# Altium PCB PC110-itx.PcbDoc (part 12 of 16)
Units mm, origin at the board's own origin, x right, y up, seen from the top; angles counter-clockwise.
Board outline 170 x 170 mm, 16 copper layers (FC1, FC2, FC3, FC4, IP1, IC1, IC2, IP2, IP3, IC3, IC4, IP4, BC4, BC3, BC2, BC1), stack 3.903 mm thick; 935 components, 1357 nets, 4698 pads, 3240 vias.
Unrouted connection lines stored in the file: 552.
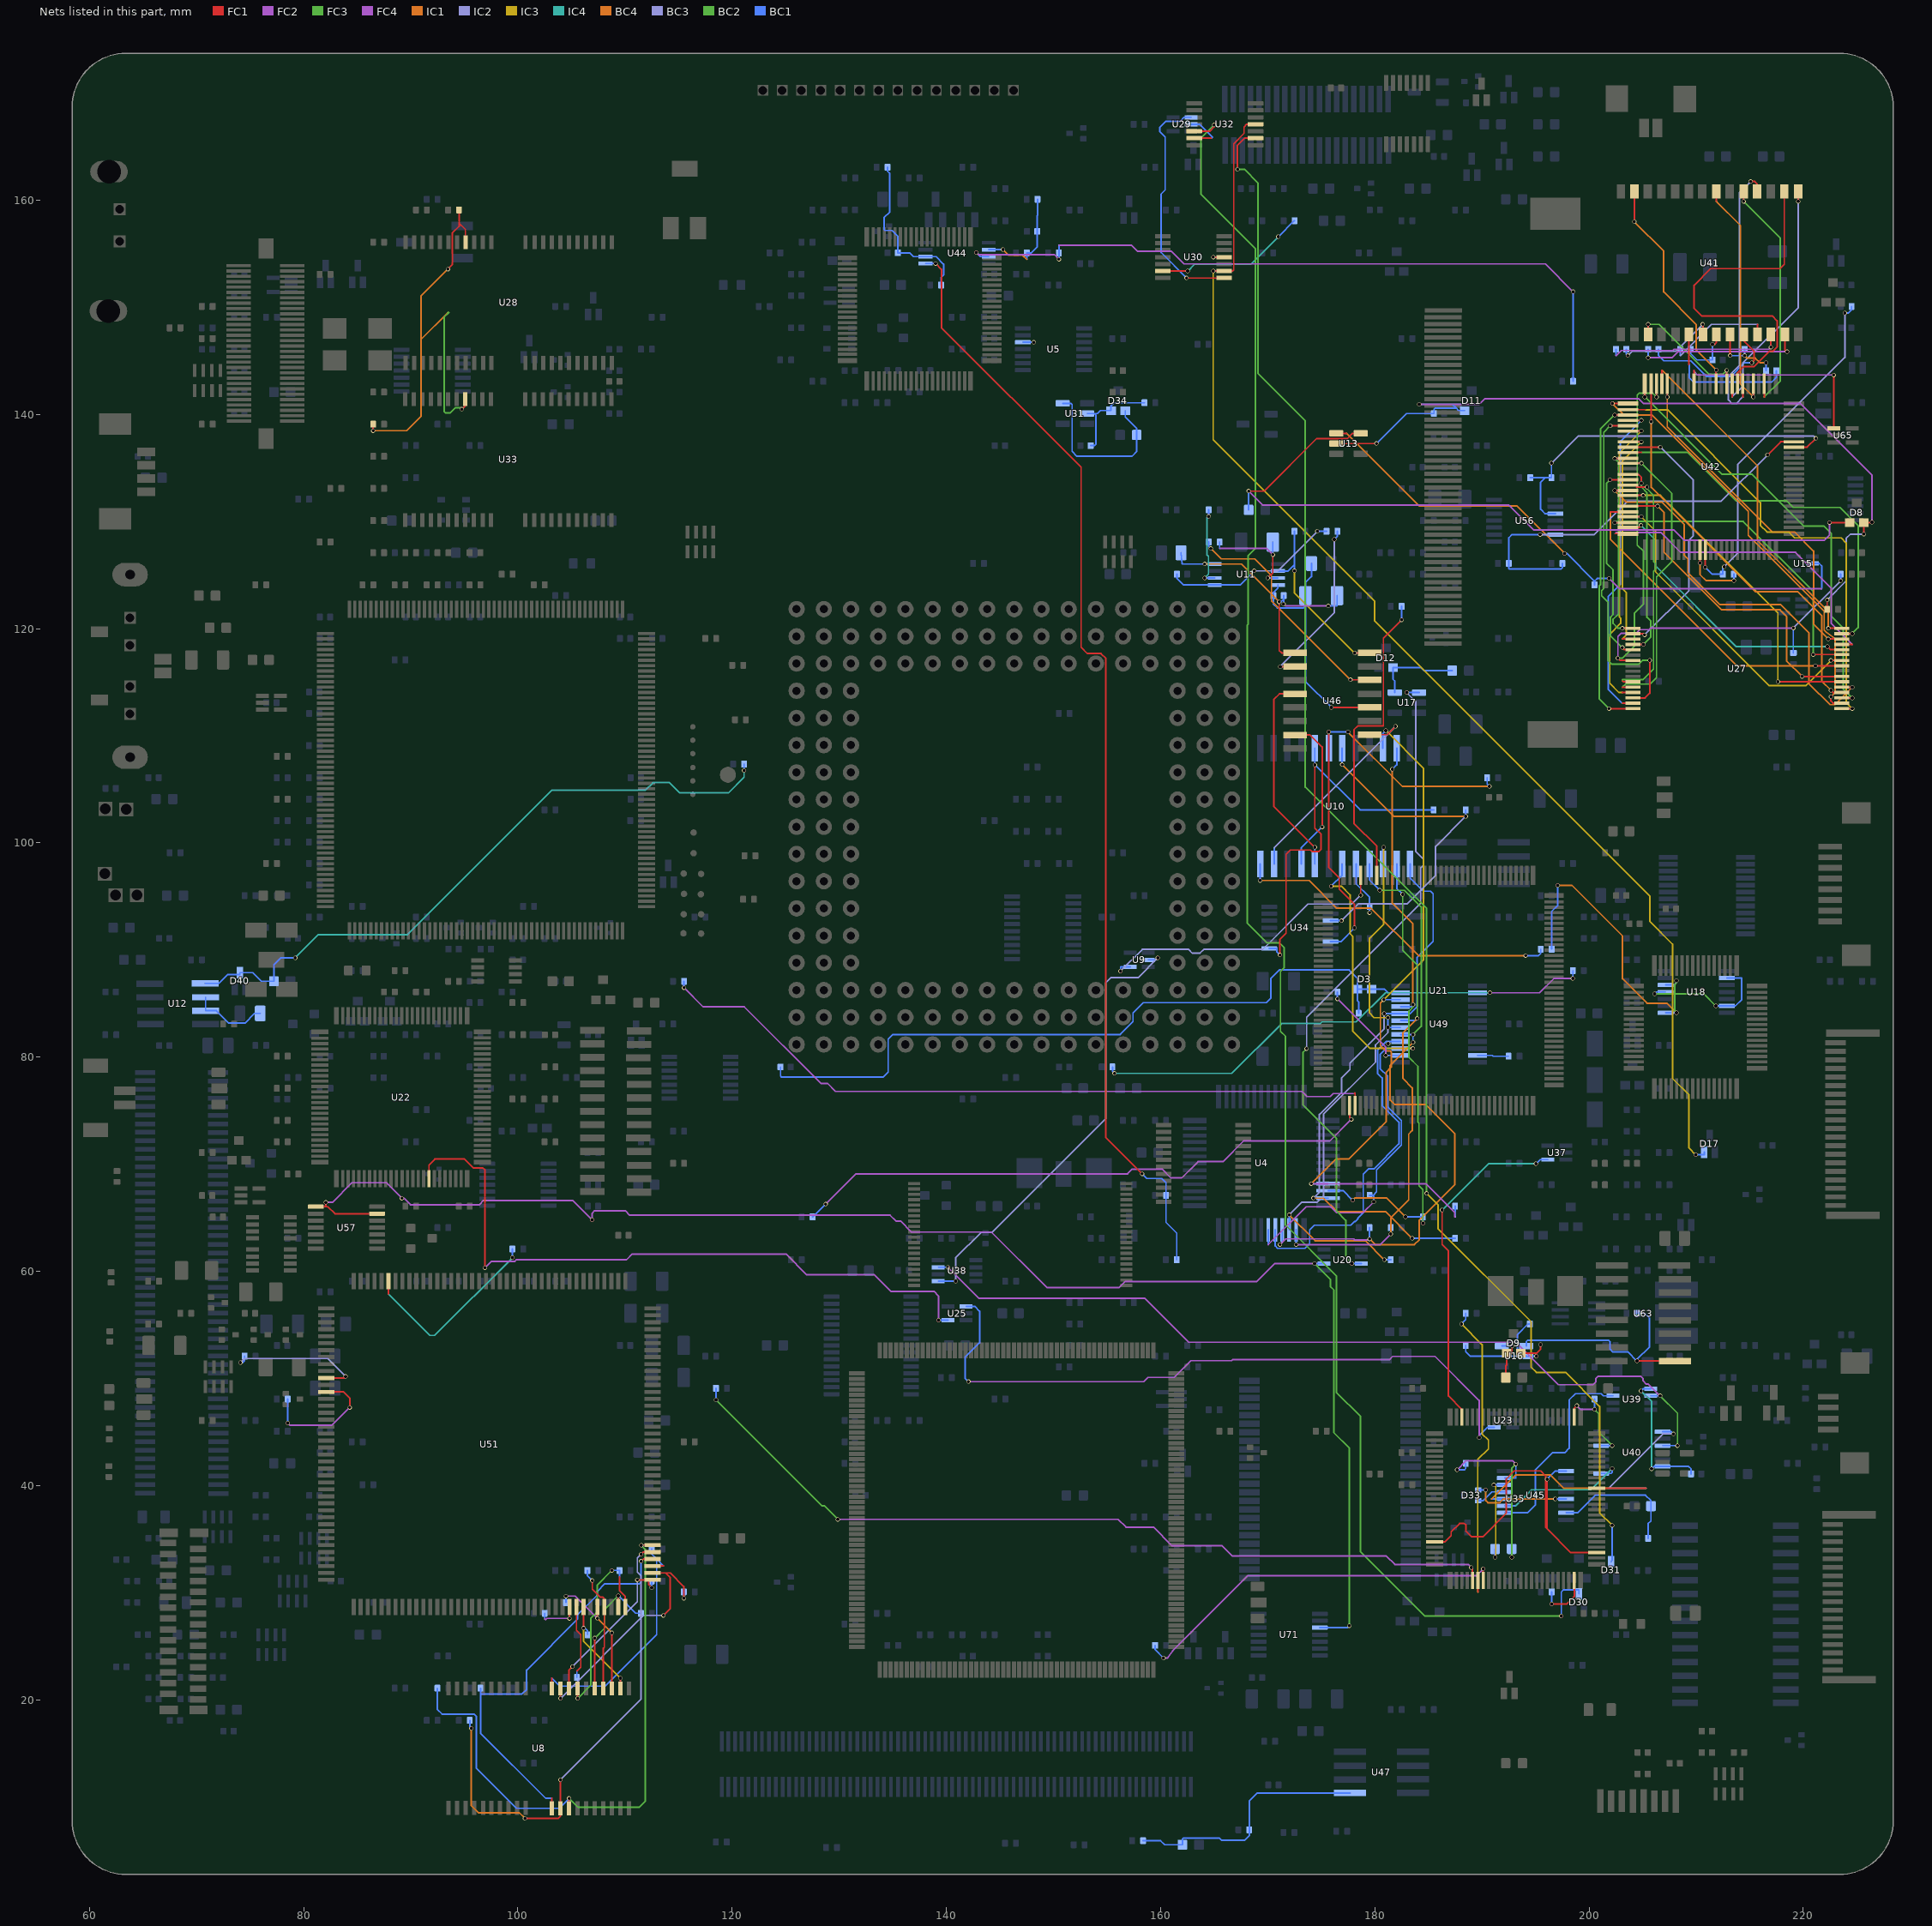
[diagram p25: the nets of this part, all layers, seen from the top]

## Via types
v1: diameter 0.4, hole 0.3, FC1 to BC1, 3240 vias

## Nets (pads, with @x,y where several pads share a name; then routed paths per layer and width w, separated by ;. In a path a pad name is that pad's centre, name@x,y a point inside that pad or via, vN(x,y) a via of type N, cw(c..) or ccw(c..) an arc to the next point about the centre after c; other vN are vias at no path point) (continued)
Net-(U10-CS#): R244.2 U10.7 U34.3 | length 33.9
  IC2 w0.15: v1(176.886,92.74) 178.456,94.31 183.007,94.31 185.674,96.977 185.674,99.67 v1(188.493,102.489)
  BC4 w0.15: v1(176.95,107.31) 181.771,102.489 v1(188.493,102.489) v1@188.49,102.492
  BC1 w0.15: U34.3@175.862,92.74 v1(176.886,92.74) ; v1(176.95,107.31) U10.7@176.95,108.84 ; v1@188.49,102.492 R244.2@188.49,103.09
Net-(U10-D0): R64.2 U4.23 U10.10 U49.22 | length 70.7
  FC2 w0.15: v1(174.067,68.19) 184.769,68.19 187.477,65.481 187.477,65.1 187.49,65.087
  IC1 w0.15: v1(174.067,68.19) 176.387,70.51 177.597,70.51 181.051,73.965 181.051,78.583 181.537,79.069 181.537,80.486 181.45,80.573 181.047,80.573 180.518,81.102 180.518,85.044 v1(180.839,85.365)
  IC3 w0.15: v1(180.839,85.365) 184.531,89.057 184.531,106.985 v1(181.026,110.49)
  BC1 w0.15: v1(174.067,68.19) U4.23@175.65,68.19 ; U10.10@180.75,108.84 180.75,110.214 v1(181.026,110.49) ; v1(180.839,85.365) U49.22@182.4,85.365 ; 187.49,65.087 R64.2@187.49,66.09
Net-(U10-D1): R54.2 U4.24 U10.11 U49.21 | length 57.9
  FC3 w0.15: v1(183.566,84.912) 183.566,84.684 183.185,84.303 183.185,79.985 184.023,79.146 184.023,73.957 184.125,73.855 184.125,67.996 184.48,67.64 184.48,64.516 v1(184.506,64.491)
  IC1 w0.15: v1(181.635,106.883) 181.635,94.361 183.555,92.441 183.555,84.918 v1(183.566,84.912) v1@183.555,84.836
  BC4 w0.15: v1(177.928,66.65) 178.132,66.853 181.102,66.853 v1(182.865,65.09)
  BC1 w0.15: U4.24@175.65,67.54 177.038,67.54 v1(177.928,66.65) ; v1(181.635,106.883) 182.05,107.298 U10.11@182.05,108.84 ; U49.21@182.4,84.715 183.434,84.715 v1@183.555,84.836 ; v1(182.865,65.09) R54.2@184.49,65.09 184.506,65.09 v1(184.506,64.491)
Net-(U10-D2): R47.2 U4.25 U10.13 U49.20 | length 54.7
  BC4 w0.15: v1(174.27,66.84) 175.214,66.84 176.472,65.582 180.998,65.582 v1(183.49,63.09)
  BC3 w0.15: v1(174.27,66.84) 174.828,67.398 174.828,74.653 176.903,76.728 176.903,78.069 177.674,78.839 177.674,79.464 180.873,82.664 v1(180.873,84.065)
  BC1 w0.15: v1(174.27,66.84) U4.25@175.65,66.84 ; v1(180.873,84.065) U49.20@182.4,84.065 183.295,84.065 183.947,84.716 183.947,89.332 185.445,90.83 185.445,95.27 185.215,95.5 184.523,95.5 183.3,96.723 U10.13@183.3,98.04 ; v1(183.49,63.09) R47.2@187.49,63.09
Net-(U10-D3): R50.2 U4.28 U10.14 U49.19 | length 50
  FC2 w0.15: v1(172.65,62.509) 180.509,62.509 v1(181.49,63.49)
  FC3 w0.15: v1(182.601,95.199) 182.601,89.967 183.961,88.606 v1(183.961,83.618) v1@183.961,83.582
  IC1 w0.15: v1(181.49,63.49) 181.49,65.006 183.159,66.675 183.159,72.822 183.49,73.152 183.49,77.14 182.624,78.006 182.624,82.281 v1(183.961,83.618)
  BC1 w0.15: v1(172.65,62.509) U4.28@172.65,63.89 ; v1(181.49,63.49) R50.2@181.49,64.09 ; U10.14@182.05,98.04 182.05,95.75 v1(182.601,95.199) ; U49.19@182.4,83.415 183.794,83.415 v1@183.961,83.582
Net-(U10-D4): R65.2 U4.29 U10.15 U49.18 | length 57.5
  IC3 w0.15: v1(180.822,99.597) 180.822,92.43 179.502,91.11 179.502,84.125 179.934,83.693 v1(181.229,83.693)
  BC4 w0.15: v1(172.009,65.278) 174.431,62.856 179.124,62.856 v1(180.89,61.09)
  BC3 w0.15: v1@172,65.269 v1(172.009,65.278) 173.203,66.472 174.625,66.472 175.209,67.056 175.209,74.688 180.061,79.539 180.061,81.139 181.229,82.308 v1(181.229,82.779)
  BC1 w0.15: U4.29@172,63.89 v1@172,65.269 ; U10.15@180.75,98.04 180.75,99.525 v1(180.822,99.597) ; v1(180.89,61.09) R65.2@181.49,61.09 ; v1(181.229,83.693) v1(181.229,82.779) ; v1(181.229,82.779) U49.18@182.4,82.765 181.243,82.765 v1(181.229,82.779)
Net-(U10-D5): R55.1 U4.30 U10.16 U49.17 | length 62.6
  FC2 w0.15: v1(171.145,62.509) 171.667,63.031 178.035,63.031 178.135,62.932 v1@179.41,62.932
  FC3 w0.15: v1(180.467,95.58) 182.778,95.58 184.328,94.031 184.328,82.877 v1(183.566,82.115)
  BC4 w0.15: v1@179.41,62.932 v1(179.51,63.031) 180.032,62.509 183.693,62.509 184.15,62.967 184.15,64.795 187.477,68.123 187.477,72.847 184.734,75.59 181.839,75.59 181.432,75.997 181.432,79.248 v1(183.566,81.382)
  BC1 w0.15: v1(171.145,62.509) 171.35,62.714 U4.30@171.35,63.89 ; U10.16@179.5,98.04 179.5,96.547 v1(180.467,95.58) ; v1(179.51,63.031) R55.1@179.51,64.09 ; U49.17@182.4,82.115 v1(183.566,82.115) v1(183.566,81.382)
Net-(U10-D6): R48.1 U4.31 U10.17 U49.16 | length 37.5
  BC1 w0.15: U4.31@170.7,63.89 170.7,62.382 170.929,62.154 173.482,62.154 173.914,62.586 173.914,63.881 174.346,64.313 177.749,64.313 178.105,64.669 178.201,64.669 178.409,64.877 178.409,64.973 178.918,65.481 178.918,69.088 179.4,69.571 179.912,69.571 182.256,71.914 182.256,73.928 180.696,75.489 180.696,78.054 180.254,78.496 180.254,80.66 181.058,81.465 181.448,81.465 ; U10.17@178.25,98.04 178.25,96.197 179.51,94.937 R48.1@179.51,94.09 v1(179.51,93.49) ; v1(181.245,81.262) 181.448,81.465 ; U49.16@182.4,81.465 181.448,81.465
Net-(U10-D7): R56.1 U4.32 U10.18 U49.15 | length 56.4
  IC3 w0.15: v1(175.92,95.961) 176.886,95.961 177.698,95.148 177.698,91.516 177.932,91.283 177.932,82.451 179.568,80.815 v1(183.555,80.815)
  FC4 w0.15: 170.05,62.512 170.053,62.509 173.584,66.04 175.87,66.04 176.428,65.481 178.892,65.481 v1(179.908,66.497)
  BC1 w0.15: 170.05,62.512 U4.32@170.05,63.89 ; v1(175.92,95.961) 176.95,96.991 U10.18@176.95,98.04 ; R56.1@179.51,67.09 179.832,67.09 ; v1(179.908,66.497) 179.908,67.014 179.832,67.09 ; v1(183.555,80.815) U49.15@182.4,80.815 181.051,80.815 180.492,80.256 180.492,78.943 181.204,78.232 181.204,75.362 182.486,74.079 182.486,71.806 180.162,69.482 180.162,67.42 179.832,67.09
Net-(U10-M): R92.2 U10.24 | length 31.1
  BC4 w0.15: v1(169.3,96.495) 173.869,96.495 176.456,93.908 179.642,93.908 184.066,89.484 v1(194.081,89.484)
  BC1 w0.15: v1(169.3,96.495) U10.24@169.3,98.04 ; v1(194.081,89.484) 195.275,89.484 195.49,89.699 R92.2@195.49,90.09
Net-(U10-MO): U10.21 U46.7 | length 14.7
  FC1 w0.15: U46.7@172.572,110.084 173.96,110.084 175.082,108.962 v1(175.082,101.498)
  BC1 w0.15: U10.21@173.15,98.04 173.15,99.566 v1(175.082,101.498)
Net-(U10-RD#): R243.2 U10.6 U34.6 | length 41.6
  FC1 w0.15: v1(175.7,110.37) 175.7,97.706 176.682,96.723 176.682,95.682 178.105,94.259 v1(178.105,92.075)
  BC4 w0.15: v1(177.495,110.363) 182.575,105.283 v1(190.693,105.283)
  BC1 w0.15: U10.6@175.7,108.84 v1@175.7,110.363 ; v1(175.7,110.37) v1@175.7,110.363 ; U34.6@175.862,90.79 176.82,90.79 v1(178.105,92.075) ; v1(177.495,110.363) v1@175.7,110.363 ; R243.2@190.49,106.09 190.49,105.486 v1(190.693,105.283)
Net-(U10-SH): U10.20 U46.4 | length 19.2
  FC1 w0.15: U46.4@172.572,113.919 171.094,113.919 170.561,113.386 170.561,103.429 v1(174.4,99.59)
  BC1 w0.15: U10.20@174.4,98.04 v1(174.4,99.59)
Net-(U10-SY): U10.23 U46.10 | length 20.3
  FC1 w0.15: U46.10@179.522,110.109 181.153,110.109 v1(181.927,110.884)
  IC2 w0.15: 170.6,99.556 v1(181.927,110.884)
  BC1 w0.15: U10.23@170.6,98.04 170.6,99.556
Net-(U10-WR#): R245.2 U10.5 U34.8 | length 37.2
  FC1 w0.15: v1(171.145,89.535) 171.145,91.008 171.713,91.576 171.713,98.942 172.11,99.339 173.99,99.339 174.142,99.187 174.752,99.187 174.981,99.416 174.981,100.813 174.396,101.397 v1(174.396,107.29)
  BC1 w0.15: U34.8@170.137,90.14 170.84,90.14 170.84,89.84 v1(171.145,89.535) ; v1(174.396,107.29) v1@174.4,107.31 ; U10.5@174.4,108.84 v1@174.4,107.31 ; R245.2@185.49,103.09 178.62,103.09 174.408,107.302 v1@174.4,107.31
Net-(U11A-+): C214.1 R75.1 U11.3 | length 10.3
  FC1 w0.15: v1(170.002,124.739) 170.475,125.212 v1(170.475,126.91)
  FC2 w0.15: 165.51,127.486 165.506,127.483 169.902,127.483 v1(170.475,126.91)
  BC1 w0.15: 165.51,127.486 R75.1@165.51,128.09 ; v1(170.002,124.739) U11.3@170.95,124.74 ; v1(170.475,126.91) C214.1@170.475,128.09
Net-(U11A--): R67.2 U11.2 U46.16 | length 16.9
  FC1 w0.15: v1(178.125,117.729) 178.13,117.734 U46.16@179.522,117.734
  IC3 w0.15: v1(172.49,125.4) 172.49,123.364 v1(178.125,117.729)
  BC1 w0.15: U11.2@170.95,125.39 171.907,125.39 172.49,125.973 ; v1(172.49,125.4) 172.49,125.973 ; R67.2@172.49,129.09 172.49,125.973
Net-(U11B-+): C44.2 R69.2 U11.5 | length 16.7
  IC2 w0.15: v1(168.747,125.4) 170.942,125.4 v1(174.632,129.09)
  BC1 w0.15: C44.2@161.52,125.09 161.52,124.724 162.154,124.09 U11.5@165.05,124.09 167.437,124.09 v1(168.747,125.4) ; v1(174.632,129.09) R69.2@175.49,129.09
Net-(U11B--): R72.2 U11.6 | length 7.6
  IC4 w0.15: v1(164.109,124.74) 164.465,125.096 164.465,126.746 164.338,126.873 164.338,130.328 v1(164.49,130.48)
  BC1 w0.15: v1(164.109,124.74) U11.6@165.05,124.74 ; v1(164.49,130.48) R72.2@164.49,131.09
Net-(U11C-V+): C157.1 C209.1 R256.1 U11.8 U46.1 | length 26
  FC1 w0.15: v1(171.069,122.504) 171.069,117.963 171.298,117.734 U46.1@172.572,117.734
  FC2 w0.15: v1(171.48,122.297) 171.654,122.123 v1(175.666,122.123)
  BC4 w0.15: v1(164.109,126.04) 167.533,126.04 v1(171.069,122.504)
  BC1 w0.15: R256.1@161.913,127.09 161.996,126.04 v1(164.109,126.04) U11.8@165.05,126.04 ; v1(171.069,122.504) 171.251,122.504 171.48,122.733 ; v1(171.48,122.297) 171.48,122.733 ; C157.1@171.48,123.09 171.48,122.733 ; v1(175.666,122.123) 176.475,122.123 C209.1@176.475,123.09
Net-(U11C-V-): C157.2 C209.2 R250.2 U11.4 U46.12 | length 23.4
  FC1 w0.15: v1(175.946,112.649) U46.12@179.522,112.649
  BC1 w0.15: U11.4@170.95,124.09 170.95,123.798 170.52,123.368 C157.2@170.52,123.09 170.52,122.317 170.895,121.942 173.344,121.942 173.525,122.123 ; R250.2@174.087,126.09 174.087,124.87 173.525,124.308 C209.2@173.525,123.09 173.525,122.123 ; v1(175.946,112.649) 173.525,115.07 173.525,122.123
Net-(U12-Bypass): C54.1 U12.2 U12.3 | length 7.2
  BC1 w0.15: U12.2@70.85,85.59 U12.3@70.85,84.34 71.857,84.34 73.012,83.185 74.524,83.185 75.429,84.09 C54.1@75.95,84.09
Net-(U12-{\S\D\}\)\: C248.2 D40.3 R247.1 U12.1 | length 62
  IC4 w0.15: v1(79.223,89.281) 81.382,91.44 89.713,91.44 103.2,104.927 111.912,104.927 112.624,105.639 114.148,105.639 115.113,104.673 119.659,104.673 121.119,106.133 v1(121.119,106.756)
  BC1 w0.15: U12.1@70.8,86.89 72.082,86.89 72.913,87.721 74.05,87.721 D40.3@74.05,87.89 75.235,87.89 76.035,87.09 C248.2@77.225,87.09 77.225,88.595 77.911,89.281 v1(79.223,89.281) ; v1(121.119,106.756) R247.1@121.119,107.362
Net-(U13-CD): C60.2 D8.3 U13.5 | length 73.8
  FC1 w0.15: v1(168.225,132.842) 169.672,132.842 174.574,137.744 177.434,137.744 177.927,138.237 U13.5@178.684,138.237 ; v1(222.453,129.91) D8.3@224.33,129.91
  FC2 w0.15: v1(168.225,132.842) 169.52,131.547 192.507,131.547 194.843,129.211 207.937,129.211 208.903,128.245 221.945,128.245 222.453,128.753 v1(222.453,129.91)
  BC1 w0.15: C60.2@168.225,131.09 v1(168.225,132.842)
Net-(U13-OUT): R83.1 U13.1 U15.2 | length 55
  FC1 w0.15: U13.1@176.408,138.237 177.343,138.237
  FC2 w0.15: v1(201.879,124.689) 202.839,123.729 221.696,123.729
  BC4 w0.15: 177.343,138.237 177.358,138.252 184.155,131.455 193.289,131.455 v1(197.718,127.025)
  BC1 w0.15: v1(197.718,127.025) 197.922,127.025 200.51,124.437 ; R83.1@200.51,124.09 200.51,124.437 ; v1(201.879,124.689) 200.762,124.689 200.51,124.437 ; U15.2@220.85,126.09 221.488,126.09 221.742,125.836 221.742,123.774 221.696,123.729
Net-(U13-VDD): C55.2 D8.1 D11.1 R84.1 U13.2 | length 78.1
  FC1 w0.15: U13.2@176.408,137.287 v1(180.153,137.287) ; R84.1@222.23,121.8 v1(222.23,122.682) ; v1(225.655,128.829) D8.1@225.655,129.91 226.39,129.91 v1(226.416,129.935)
  FC2 w0.15: v1(184.15,140.945) 189.738,140.945 190.271,141.478 204.622,141.478 205.065,141.035 219.693,141.035 226.416,134.313 v1(226.416,129.935)
  BC3 w0.15: v1(222.23,122.682) 224.003,124.455 224.003,128.422 224.409,128.829 v1(225.655,128.829)
  BC1 w0.15: v1(180.153,137.287) 182.956,140.09 C55.2@185.52,140.09 185.52,140.486 185.623,140.59 187.587,140.59 ; v1(184.15,140.945) 187.232,140.945 187.587,140.59 ; D11.1@188.375,140.365 187.812,140.365 187.587,140.59
Net-(U16-CD): C59.1 D9.3 U16.5 | length 4.4
  FC1 w0.15: C59.1@192.225,50.09 192.225,51.181 192.3,51.256 D9.3@192.3,52.365 192.811,52.365 v1(192.811,53.035)
  BC1 w0.15: U16.5@191.863,53.04 192.807,53.04 v1(192.811,53.035)
Net-(U16-OUT): R91.1 U16.1 U63.9 | length 21.4
  FC1 w0.15: v1(204.47,51.64) U63.9@208,51.64
  BC1 w0.15: U16.1@194.137,53.04 194.137,53.447 194.259,53.569 201.828,53.569 201.955,53.442 201.955,52.73 202.184,52.502 203.606,52.502 204.468,51.64 v1(204.47,51.64) 204.47,51.791 205.638,52.959 205.638,55.684 205.232,56.09 R91.1@204.51,56.09
Net-(U16-VDD): C56.1 D9.1 R79.2 U16.2 | length 13.5
  FC1 w0.15: D9.1@193.625,52.365 195.087,52.365 195.478,52.756 v1(195.478,53.162)
  BC1 w0.15: R79.2@188.49,53.09 188.49,52.502 188.902,52.09 U16.2@193.63,52.09 ; C56.1@194.48,55.09 194.307,55.09 193.319,54.102 193.319,52.4 U16.2@193.63,52.09 ; v1(195.08,52.09) U16.2@194.137,52.09 U16.2@193.63,52.09
Net-(U17-CD): C57.2 D12.3 U17.5 | length 8
  BC1 w0.15: U17.5@181.862,114.04 181.862,115.113 181.7,115.275 D12.3@181.7,116.365 184.302,116.365 184.577,116.09 C57.2@187.225,116.09
Net-(U17-OUT): U17.1 U20.3 | length 62.5
  FC3 w0.15: v1(173.634,80.797) 173.304,80.467 173.304,75.54 176.428,72.415 176.428,65.634 177.292,64.77 177.292,61.299 v1(177.851,60.74)
  BC3 w0.15: v1(173.634,80.797) 173.634,83.718 184.285,94.369 184.285,97.645 184.53,97.891 184.53,98.501 183.819,99.212 183.819,113.208 v1(182.982,114.046)
  BC1 w0.15: v1(177.851,60.74) U20.3@178.75,60.74 ; v1(182.982,114.046) 182.988,114.04 U17.1@184.138,114.04
Net-(U18A-D): U18.2 U18.6 U18.11 | length 13.3
  BC2 w0.15: v1(206.121,85.903) 210.723,85.903 v1(211.836,84.79)
  BC1 w0.15: v1(206.121,85.903) 206.308,86.09 U18.11@207.138,86.09 ; v1(211.836,84.79) U18.6@212.863,84.79 213.665,84.79 214.249,85.374 214.249,87.376 214.235,87.39 U18.2@212.863,87.39
Net-(U18B-D): R92.1 U18.8 U18.12 | length 30
  FC3 w0.15: v1@208.143,84.14 v1(208.153,84.15) 208.001,84.303 208.001,86.789 208.155,86.943 v1(208.155,87.146)
  BC4 w0.15: v1(197.079,96.037) 198.399,96.037 203.124,91.313 203.124,87.325 205.41,85.039 207.264,85.039 v1(208.153,84.15)
  BC1 w0.15: R92.1@196.51,90.09 196.51,93.599 197.079,94.168 v1(197.079,96.037) ; U18.8@207.138,84.14 v1@208.143,84.14 ; U18.12@207.138,86.74 207.952,86.74 208.155,86.943 v1(208.155,87.146)
Net-(U20-Pad6): U20.6 U57.1 U57.13 U71.3 | length 144.8
  FC1 w0.15: U57.1@81.138,66.04 81.966,66.04 ; v1(82.067,66.446) 82.067,66.142 81.966,66.04 ; U57.13@86.863,65.39 82.921,65.39 82.271,66.04 81.966,66.04
  FC2 w0.15: v1(82.067,66.446) 82.677,66.446 84.506,68.275 87.732,68.275 v1(89.179,66.827) ; v1(106.934,64.81) 106.934,65.43 107.163,65.659 110.018,65.659 110.428,65.249 134.75,65.249 135.299,64.7 135.717,64.7 136.739,63.678 144.196,63.678 149.377,58.496 156.134,58.496 156.693,59.055 168.986,59.055 170.671,60.74 v1(174.37,60.74)
  FC3 w0.15: v1(174.37,60.74) 175.844,59.266 175.844,58.598 176.178,58.264 176.178,44.955 177.622,43.51 v1(177.622,26.924)
  FC4 w0.15: v1(89.179,66.827) 89.371,66.827 89.966,66.232 96.407,66.232 96.799,66.624 105.12,66.624 v1(106.934,64.81)
  BC1 w0.15: v1(174.37,60.74) U20.6@175.25,60.74 ; U71.3@174.862,26.74 177.438,26.74 v1(177.622,26.924)
Net-(U21-Chipset_IO3): R149.1 U21.39 | length 68.8
  FC1 w0.15: 178.077,76.603 178.156,76.681 U21.39@178.156,75.491
  FC2 w0.15: v1(115.51,86.487) 117.288,84.709 121.133,84.709 128.284,77.557 128.906,77.557 129.657,76.806 173.214,76.806 173.692,76.328 175.83,76.328 176.105,76.603 178.077,76.603
  BC1 w0.15: v1(115.51,86.487) R149.1@115.51,87.09
Net-(U21-CPUCLK): R257.1 U21.38 | length 56.1
  FC1 w0.15: U21.38@177.648,75.491 177.648,74.345 v1(177.8,74.193)
  FC4 w0.15: v1(128.727,66.284) 131.557,69.113 156.921,69.113 157.353,69.545 160.147,69.545 160.954,68.739 161.982,68.739 163.5,70.256 165.813,70.256 167.738,72.182 175.789,72.182 v1(177.8,74.193)
  BC1 w0.15: R257.1@127.51,65.09 127.533,65.09 v1(128.727,66.284)
Net-(U21-PSU_IO2): R104.1 U21.138 | length 29.2
  FC1 w0.15: U21.138@180.182,96.966 180.182,99.695 178.054,101.823 178.054,110.566 178.41,110.922 180.797,110.922 180.797,119.115 v1(182.51,120.828)
  BC1 w0.15: v1(182.51,120.828) R104.1@182.51,122.09
Net-(U21-PWRGD_IN): U9.4 U21.141 | length 28.8
  FC1 w0.15: v1(178.682,95.123) U21.141@178.682,96.966
  IC2 w0.15: v1(156.261,88.036) 158.293,90.068 162.612,90.068 162.967,89.713 163.678,89.713 164.033,90.068 169.533,90.068 173.757,94.293 177.852,94.293 v1(178.682,95.123)
  BC1 w0.15: v1(156.261,88.036) 156.261,88.437 U9.4@157.15,88.44
Net-(U22-IOW#): U22.43 U25.4 | length 63.9
  FC1 w0.15: U22.43@91.7,68.66 91.7,69.934 92.253,70.487 95.019,70.487 95.834,69.672 96.723,69.672 96.926,69.469 v1(96.926,60.35)
  FC2 w0.15: v1(96.926,60.35) 97.508,60.932 99.69,60.932 99.845,61.087 110.134,61.087 110.668,61.62 125.044,61.62 126.975,59.69 133.274,59.69 134.823,58.141 138.836,58.141 139.268,57.709 v1(139.268,55.448)
  BC1 w0.15: v1(139.268,55.448) 139.276,55.44 U25.4@140.15,55.44
Net-(U23-Pad4): U23.4 U25.1 | length 64.5
  FC2 w0.15: v1(142.062,49.708) 158.417,49.708 158.82,50.111 161.261,50.111 162.814,51.664 166.625,51.664 166.726,51.765 181.355,51.765 181.66,52.069 185.624,52.069 189.738,47.956 v1(189.738,44.475)
  BC1 w0.15: U25.1@141.85,56.74 142.646,56.74 143.104,56.283 143.104,53.34 141.75,51.986 141.75,50.02 v1(142.062,49.708) ; v1(189.738,44.475) 189.738,44.679 190.499,45.44 U23.4@191.15,45.44
Net-(U27-MA0): U27.20 U42.74 | length 39
  FC1 w0.15: v1(205.802,139.319) U42.74@205.802,142.875 ; v1(222.58,114.249) 222.789,114.04 U27.20@223.58,114.04
  IC1 w0.15: v1(205.802,139.319) 205.802,133.186 215.519,123.469 219.481,123.469 221.716,121.235 221.716,115.114 v1(222.58,114.249)
Net-(U27-MA1): U27.19 U42.75 | length 41.1
  FC1 w0.15: v1(205.202,141.63) U42.75@205.202,142.875 ; U27.19@223.58,113.54 224.557,113.54 v1(224.559,113.538)
  FC3 w0.15: v1(205.202,141.63) 212.416,134.417 215.214,134.417 220.04,129.591 221.92,129.591 222.606,128.905 222.606,121.209 223.723,120.091 223.723,114.374 v1(224.559,113.538)
Net-(U27-MA2): U27.18 U42.76 | length 40.7
  FC1 w0.15: v1(202.184,141.025) U42.76@203.627,141.025 ; v1(222.58,113.64) 222.58,113.259 222.799,113.04 U27.18@223.58,113.04
  IC1 w0.15: v1(202.184,141.025) 203.255,139.954 205.867,139.954 214.859,130.962 214.859,128.727 221.946,121.64 221.946,119.888 222.149,119.685 222.961,119.075 222.961,114.021 v1(222.58,113.64)
Net-(U27-MA3): U27.17 U42.77 | length 43.5
  FC1 w0.15: U42.77@203.627,140.45 205.269,140.45 ; U27.17@223.58,112.54 v1(224.561,112.54)
  IC3 w0.15: 205.269,140.45 205.283,140.437 207.34,140.437 216.002,131.775 216.002,129.642 216.611,129.032 218.618,129.032 219.177,128.473 223.545,128.473 224.003,128.016 224.003,113.099 v1(224.561,112.54)
Net-(U27-MA4): U27.16 U42.78 | length 31.9
  FC1 w0.15: v1(201.854,112.54) U27.16@204.08,112.54 ; v1(202.387,139.954) 202.391,139.95 U42.78@203.627,139.95
  FC3 w0.15: v1(201.854,112.54) 200.939,113.456 200.939,123.978 201.066,124.106 201.066,138.633 v1(202.387,139.954)
Net-(U27-MA5): U27.15 U42.79 | length 30.5
  FC1 w0.15: 203.108,113.04 U27.15@204.08,113.04 ; U42.79@203.627,139.45 v1(204.876,139.45)
  BC1 w0.15: 203.108,113.04 203.098,113.03 201.803,114.325 201.803,123.038 202.921,124.155 202.921,137.494 v1(204.876,139.45)
Net-(U27-MA6): U27.14 U42.80 | length 33.2
  FC1 w0.15: v1(201.981,138.95) U42.80@203.627,138.95 ; U27.14@204.08,113.54 205.232,113.54 205.664,113.972 v1(205.664,117.043)
  FC3 w0.15: v1(201.981,138.95) 201.371,138.34 201.371,123.749 201.169,123.546 201.169,123.063 201.775,122.456 201.775,117.045 202.133,116.688 204.622,116.688 204.978,117.043 v1(205.664,117.043)
Net-(U27-MA7): U27.13 U42.81 | length 28.6
  FC1 w0.15: 203.104,114.04 U27.13@204.08,114.04 ; U42.81@203.627,138.45 204.871,138.45 v1(204.876,138.455)
  IC3 w0.15: 203.104,114.04 203.098,114.046 202.794,114.046 201.932,114.907 201.932,119.484 202.945,120.497 202.945,120.98 202.844,121.081 202.844,136.423 v1(204.876,138.455)
Net-(U27-MA8): U27.3 U42.83 | length 21.7
  FC1 w0.15: 203.108,119.04 U27.3@204.08,119.04 ; U42.83@203.627,137.45 204.866,137.45 v1(204.876,137.439)
  IC3 w0.15: 203.108,119.04 203.098,119.05 203.479,119.431 203.479,123.368 203.124,123.723 203.124,135.687 v1(204.876,137.439)
Net-(U27-MA9): U27.2 U42.84 | length 24.8
  FC1 w0.15: U42.84@203.627,136.95 v1(206.654,136.95) ; U27.2@204.08,119.54 205.072,119.54 v1(205.181,119.431)
  BC3 w0.15: v1(205.181,119.431) 209.321,123.571 209.321,128.27 209.728,128.676 209.728,133.877 v1(206.654,136.95)
Net-(U27-MA10): U27.31 U42.85 | length 35.6
  FC1 w0.15: U42.85@203.627,136.45 204.875,136.45 ; U27.31@223.58,119.54 v1(224.561,119.54)
  BC2 w0.15: 204.875,136.45 204.876,136.449 209.22,136.449 213.741,131.928 218.465,131.928 219.075,131.318 223.444,131.318 225.12,129.642 225.12,120.099 v1(224.561,119.54)
Net-(U27-MA11): U27.1 U42.86 | length 19
  FC1 w0.15: v1(202.387,135.89) 202.397,135.9 U42.86@203.627,135.9 ; v1(203.099,120.04) U27.1@204.08,120.04
  FC3 w0.15: v1(202.387,135.89) 202.768,135.509 202.768,121.412 202.235,120.879 202.235,120.498 202.693,120.04 v1(203.099,120.04)
Net-(U27-MA12): U27.12 U42.87 | length 27.6
  FC1 w0.15: 203.11,114.54 U27.12@204.08,114.54 ; U42.87@203.627,135.45 v1(204.893,135.45)
  FC3 w0.15: 203.11,114.54 203.403,114.833 205.715,114.833 206.299,115.418 206.299,124.841 207.721,126.263 207.721,132.622 v1(204.893,135.45)
Net-(U27-MA13): U27.4 U42.89 | length 18.6
  FC1 w0.15: U42.89@203.627,134.4 204.622,134.4 204.876,134.146 v1(204.876,133.579) ; U27.4@204.08,118.54 v1(205.08,118.54)
  FC3 w0.15: v1(204.876,133.579) 204.876,133.222 205.409,132.69 205.409,121.057 205.765,120.701 205.765,119.226 v1(205.08,118.54)
Net-(U27-MA14): U27.5 U42.90 | length 19.3
  FC1 w0.15: v1(201.955,133.9) U42.90@203.627,133.9 ; v1(203.098,118.237) 203.295,118.04 U27.5@204.08,118.04
  FC3 w0.15: v1(201.955,133.9) 201.625,133.57 201.625,126.111 202.235,125.501 202.235,121.311 202.005,121.081 202.005,119.33 v1(203.098,118.237)
Net-(U27-MA15): U27.11 U42.91 | length 23.8
  FC1 w0.15: 203.098,115.142 203.2,115.04 U27.11@204.08,115.04 ; U42.91@203.627,133.4 204.419,133.4 204.419,133.223 v1(205.41,133.223)
  FC3 w0.15: 203.098,115.142 203.098,115.24 205.029,115.24 206.019,116.23 206.019,125.375 206.197,125.552 206.197,126.085 206.019,126.262 206.019,132.451 205.41,133.06 v1(205.41,133.223)
Net-(U27-MD0): U27.21 U42.92 | length 38.6
  FC1 w0.15: v1(202.387,132.9) U42.92@203.627,132.9 ; U27.21@223.58,114.54 224.55,114.54 v1(224.561,114.529)
  IC1 w0.15: v1(202.387,132.9) 203.461,131.826 206.781,131.826 208.864,129.743 208.864,126.873 209.22,126.517 209.22,125.247 212.217,122.25 217.907,122.25 220.523,119.634 220.523,114.884 222.504,112.903 222.936,112.903 v1(224.561,114.529)
Net-(U27-MD1): U27.22 U42.93 | length 30.9
  FC1 w0.15: U42.93@203.627,132.45 v1(205.054,132.45) ; v1(217.627,115.04) U27.22@223.58,115.04
  IC3 w0.15: v1(205.054,132.45) 206.665,132.45 217.627,121.488 v1(217.627,115.04)
Net-(U27-MD2): U27.23 U42.95 | length 31.2
  FC1 w0.15: U42.95@203.627,131.45 v1(206.4,131.45) ; v1(219.892,115.54) U27.23@223.58,115.54
  IC1 w0.15: v1(206.4,131.45) 206.985,130.866 206.985,127.152 212.369,121.768 217.83,121.768 218.44,121.158 218.44,116.992 v1(219.892,115.54)
Net-(U27-MD3): U27.25 U42.96 | length 30.7
  FC1 w0.15: 201.992,130.9 U42.96@203.627,130.9 ; v1(221.132,116.54) U27.25@223.58,116.54
  BC4 w0.15: 201.992,130.9 201.981,130.912 201.981,128.346 213.787,116.54 v1(221.132,116.54)
Net-(U27-MD4): U27.26 U42.97 | length 29.7
  FC1 w0.15: U42.97@203.627,130.45 v1(204.876,130.45) ; v1(222.58,117.04) U27.26@223.58,117.04
  IC3 w0.15: v1(204.876,130.45) 206.197,129.13 206.197,125.324 216.84,114.681 220.221,114.681 v1(222.58,117.04)
Net-(U27-MD5): U27.27 U42.98 | length 31.1
  FC1 w0.15: v1(202.387,129.9) U42.98@203.627,129.9 ; v1(220.929,117.59) U27.27@223.58,117.59
  BC2 w0.15: v1(202.387,129.9) 202.495,130.008 214.39,130.008 220.929,123.469 v1(220.929,117.59)
Net-(U27-MD6): U27.28 U42.99 | length 26.3
  FC1 w0.15: U42.99@203.627,129.45 204.659,129.45 v1(204.851,129.642) ; v1(222.25,118.339) 222.549,118.04 U27.28@223.58,118.04
  IC4 w0.15: v1(204.851,129.642) 206.197,128.296 206.197,125.858 213.716,118.339 v1(222.25,118.339)
Net-(U27-MD7): U27.29 U42.100 | length 30.6
  FC1 w0.15: 202.433,128.875 U42.100@203.627,128.875 ; U27.29@223.58,118.54 224.56,118.54
  FC2 w0.15: 202.433,128.875 202.539,128.981 206.705,128.981 208.559,127.127 219.278,127.127 222.606,123.8 222.606,120.498 224.561,118.542 224.56,118.54
Net-(U27-ROMCEL0#): U27.30 U42.71 | length 32.5
  FC1 w0.15: v1(207.302,141.63) U42.71@207.302,142.875 ; v1(222.336,119.04) U27.30@223.58,119.04
  BC4 w0.15: v1(207.302,141.63) 207.302,138.849 217.119,129.032 219.177,129.032 220.955,127.254 220.955,120.421 v1(222.336,119.04)
Net-(U27-ROMOEL#): U27.32 U42.72 | length 33
  FC1 w0.15: U42.72@206.802,142.875 206.802,144.115 ; v1(222.337,120.04) U27.32@223.58,120.04
  IC1 w0.15: 206.802,144.115 206.807,144.12 215.722,135.204 215.722,128.219 222.337,121.604 v1(222.337,120.04)
Net-(U27-ROMWEL#): R131.2 R134.1 U27.7 U42.73 | length 58.7
  FC1 w0.15: v1(202.694,117.243) 202.897,117.04 U27.7@204.08,117.04 ; v1(206.299,141.634) 206.302,141.637 U42.73@206.302,142.875
  FC2 w0.15: v1(202.694,117.243) 202.694,119.28 202.971,119.558 204.394,119.558 204.747,119.911 205.6,119.911 205.755,120.065 v1(219.07,120.065)
  FC3 w0.15: v1(202.694,117.243) 203.1,117.243 204.241,118.385 204.241,121.463 205.08,122.301 205.08,127.229 204.495,127.813 204.495,141.808 204.673,141.986 205.946,141.986 v1(206.299,141.634)
  BC3 w0.15: v1(219.07,120.065) v1(223.49,124.485)
  BC1 w0.15: R134.1@219.07,117.74 v1(219.07,120.065) ; v1(223.49,124.485) R131.2@223.49,125.09
Net-(U28-RAS#): R101.1 R105.2 U28.15 U33.15 | length 44.5
  FC1 w0.15: v1(86.49,138.481) R101.1@86.49,139.09 ; v1(93.472,153.568) 93.878,153.975 93.878,156.925 94.51,157.556 94.51,157.874 ; R105.2@94.51,159.09 94.51,157.874 ; v1(94.767,140.487) 95.087,140.807 U33.15@95.087,141.423 ; U28.15@95.108,156.082 95.108,157.277 94.51,157.874
  FC3 w0.15: 93.472,149.504 93.548,149.504 93.116,149.073 93.116,140.284 93.269,140.132 93.675,140.132 94.158,140.614 94.64,140.614 v1(94.767,140.487)
  IC1 w0.15: v1(86.49,138.481) 89.637,138.481 90.957,139.802 90.957,146.99 ; 93.472,149.504 90.957,146.99 ; v1(93.472,153.568) 90.957,151.054 90.957,146.99
Net-(U30A-{\Q\}\)\: R146.1 U30.6 | length 14.3
  FC1 w0.15: U30.6@160.206,153.386 v1(162.53,153.386)
  IC4 w0.15: v1(162.53,153.386) 163.17,154.026 168.427,154.026 v1(170.993,156.591)
  BC1 w0.15: v1(170.993,156.591) 172.491,158.09 R146.1@172.51,158.09
Net-(U30B-C): U5.12 U30.11 | length 2
  FC1 w0.15: v1(164.913,154.686) U30.11@165.93,154.686
  BC1 w0.15: U5.12@147.137,146.74 v1(148.155,146.74)
Net-(U30B-Q): D17.1 U30.9 U32.11 | length 119.1
  FC1 w0.15: v1(164.913,153.386) U30.9@165.93,153.386 166.726,153.386 166.827,153.488 166.827,165.278 167.792,166.243 167.792,166.836 168.046,167.09 U32.11@168.863,167.09
  IC3 w0.15: v1(164.913,153.386) 164.913,137.626 179.984,122.555 179.984,120.726 205.687,95.024 205.687,92.662 207.797,90.551 207.797,78.003 209.321,76.479 209.321,71.526 v1(209.956,70.891)
  BC1 w0.15: v1(209.956,70.891) 210.751,70.891 D17.1@210.751,71.132
Net-(U30B-{\Q\}\)\: U29.1 U30.8 | length 22.2
  FC1 w0.15: v1(162.427,152.736) U30.8@165.93,152.736
  BC1 w0.15: v1(162.427,152.736) 160.045,155.118 160.045,160.579 160.426,160.96 160.426,165.913 159.918,166.421 159.918,166.802 160.477,167.361 161.823,167.361 162.203,167.74 U29.1@162.85,167.74
Net-(U31-CD): C100.1 D34.3 U31.5 | length 16
  BC1 w0.15: U31.5@150.862,141.04 151.619,141.04 151.74,140.919 151.74,136.55 152.191,136.099 157.324,136.099 157.775,136.55 C100.1@157.775,138.09 157.775,138.684 156.7,139.759 D34.3@156.7,140.365
Net-(U31-VDD): C97.1 D34.1 R195.2 U31.2 | length 9.5
  BC1 w0.15: U31.2@153.138,140.09 153.822,140.09 ; C97.1@153.48,137.09 153.822,137.09 153.975,137.242 153.975,139.938 153.822,140.09 ; R195.2@158.49,141.09 155.647,141.09 155.375,140.818 D34.1@155.375,140.365 154.377,140.365 154.102,140.09 153.822,140.09
Net-(U32A-Q): D30.3 U32.5 | length 169.2
  FC1 w0.15: U32.5@163.137,166.44 164.592,166.44 164.998,166.846 v1(164.998,167.03)
  FC3 w0.15: v1(164.998,167.03) 163.779,165.811 163.779,160.553 168.859,155.474 168.859,127.508 168.173,126.823 168.173,120.421 168.097,120.345 168.097,92.507 169.926,90.678 171.094,90.678 171.526,90.246 171.526,88.341 171.196,88.011 171.196,82.423 171.653,81.966 171.653,64.338 176.408,59.583 176.408,48.713 178.664,46.457 178.664,33.833 184.658,27.838 v1(197.409,27.838)
  BC1 w0.15: v1(197.409,27.838) 197.409,30.074 197.612,30.277 199.05,30.277 D30.3@199.05,29.89
Net-(U32A-{\Q\}\)\: U29.2 U32.6 | length 4.2
  FC1 w0.15: U32.6@163.137,165.79 164.749,165.79
  BC1 w0.15: U29.2@162.85,167.09 163.643,167.09 164.846,165.887 164.749,165.79
Net-(U32B-Q): D31.3 U32.9 | length 150.7
  FC1 w0.15: v1(167.183,162.89) 167.183,165.13 167.843,165.79 U32.9@168.863,165.79
  FC3 w0.15: v1(167.183,162.89) 167.818,162.89 169.089,161.619 169.089,143.839 173.507,139.421 173.507,105.207 184.836,93.878 v1(184.836,67.285)
  IC3 w0.15: v1(184.836,67.285) 185.916,66.205 185.916,63.969 194.589,55.296 194.589,51.054 195.072,50.571 197.815,50.571 200.99,47.396 200.99,37.465 v1(202.159,36.297)
  BC1 w0.15: D31.3@202.05,32.89 202.159,33.052 v1(202.159,36.297)
Net-(U35-FF_2D): R186.1 U35.2 U40.12 | length 9
  FC1 w0.15: U35.2@198.62,46.4 198.62,47.236 v1(198.857,47.473)
  FC2 w0.15: v1(198.857,47.473) 199.212,47.117 v1(200.51,47.117)
  BC2 w0.15: v1(200.51,47.117) 200.914,46.713 200.914,44.983 v1(202.159,43.739)
  BC1 w0.15: v1(200.51,47.117) R186.1@200.51,48.09 ; U40.12@201.138,43.74 v1(202.159,43.739) v1(202.159,43.739)
Net-(U35-FF_2Q#): U35.90 U40.1 U45.12 | length 34.4
  FC1 w0.15: U35.90@200.72,39.75 201.8,39.75 205.308,39.751
  BC4 w0.15: 190.916,38.765 193.146,40.996 196.418,40.996 197.663,39.751 205.308,39.751
  BC3 w0.15: 205.308,39.751 201.8,39.75 206.881,44.831 v1(207.874,44.831)
  BC1 w0.15: 190.916,38.765 U45.12@192.137,38.765 ; U40.1@206.863,45.04 207.665,45.04 v1(207.874,44.831)
Net-(U35-Pluto_55): R398.2 U35.55 | length 79.3
  FC1 w0.15: v1(189.001,32.351) 189.12,32.233 U35.55@189.12,31.15
  FC2 w0.15: v1(129.87,36.855) 156.032,36.855 156.769,36.119 159.334,36.119 161.042,34.411 165.716,34.411 166.7,33.426 181.077,33.426 181.864,32.639 188.714,32.639 v1(189.001,32.351)
  BC2 w0.15: v1(118.49,48.01) 128.372,38.129 128.597,38.129 v1(129.87,36.855)
  BC1 w0.15: v1(118.49,48.01) R398.2@118.49,49.09
Net-(U35-Pluto_56): R392.2 U35.56 | length 28.7
  FC1 w0.15: 189.62,30.083 U35.56@189.62,31.15
  IC3 w0.15: v1(188.087,55.093) 190.017,53.162 190.017,44.831 190.602,44.247 190.602,43.434 189.611,42.443 189.611,30.074 189.62,30.083
  BC1 w0.15: v1(188.087,55.093) 188.49,55.496 R392.2@188.49,56.09
Net-(U35-Pluto_57): R399.2 U35.57 | length 35.9
  FC1 w0.15: v1(190.119,32.233) v1(190.119,32.233) U35.57@190.12,31.15
  FC2 w0.15: v1(160.274,23.909) 160.645,23.909 161.119,24.551 168.166,31.598 189.484,31.598 v1(190.119,32.233)
  BC1 w0.15: R399.2@159.49,25.09 159.49,24.693 v1(160.274,23.909)
Net-(U35-PNET7_SENSE): R304.1 U35.74 | length 5
  FC1 w0.15: v1(196.51,28.956) 197.917,28.956 198.62,29.659 U35.74@198.62,31.15
  BC1 w0.15: v1(196.51,28.956) R304.1@196.51,30.09
Net-(U35-SA13): U35.23 U37.4 | length 31.9
  FC1 w0.15: v1(186.284,65.735) 186.284,62.509 186.868,61.925 186.868,48.369 188.12,47.117 U35.23@188.12,46.4
  IC4 w0.15: v1(186.284,65.735) 190.602,70.053 v1(195.047,70.053)
  BC1 w0.15: v1(195.047,70.053) 195.433,70.44 U37.4@196.15,70.44
Net-(U38-Pad5): U9.2 U38.5 | length 42.7
  BC3 w0.15: v1(140.868,59.09) 140.868,61.265 143.256,63.652 144.247,63.652 154.889,74.295 154.889,86.97 155.346,87.427 157.886,87.427 v1(159.741,89.281)
  BC1 w0.15: U38.5@139.25,59.09 v1(140.868,59.09) ; U9.2@158.85,89.09 159.55,89.09 v1(159.741,89.281)
Net-(U40A-C): U38.7 U39.2 U40.3 | length 80.9
  FC3 w0.15: v1(206.63,48.39) 208.255,46.765 v1(208.255,43.74)
  FC4 w0.15: v1(140.143,60.39) 143.027,57.506 158.521,57.506 162.636,53.391 193.167,53.391 197.129,49.428 200.355,49.428 200.635,49.708 200.635,50.013 200.838,50.216 204.804,50.216 205.049,49.971 205.049,49.784 205.349,49.484 205.536,49.484 v1(206.63,48.39)
  BC1 w0.15: U38.7@139.25,60.39 v1(140.143,60.39) ; U39.2@205.75,48.39 v1(206.63,48.39) ; U40.3@206.863,43.74 v1(208.255,43.74)
Net-(U40A-{\Q\}\)\: C125.2 U39.1 U40.6 | length 13
  IC4 w0.15: v1(204.851,48.844) 205.842,47.854 v1(205.842,41.58)
  BC1 w0.15: v1(204.851,48.844) 205.047,49.04 U39.1@205.75,49.04 ; v1(205.842,41.58) 206.052,41.79 U40.6@206.863,41.79 209.296,41.79 209.52,41.566 C125.2@209.52,41.09
Net-(U40B-{\Q\}\)\: U40.8 U45.11 | length 12.9
  IC4 w0.15: 193.142,38.115 194.651,39.624 200.177,39.624 v1(202.159,41.605)
  BC1 w0.15: U45.11@192.137,38.115 193.142,38.115 ; U40.8@201.138,41.14 202.049,41.14 202.159,41.25 v1(202.159,41.605)
Net-(U41-Cext2): C141.1 U41.20 | length 13.2
  FC1 w0.15: 209.325,144.675 U41.20@209.325,147.475
  BC1 w0.15: 209.325,144.675 209.347,144.653 209.347,143.434 209.753,143.027 217.048,143.027 217.48,143.459 C141.1@217.48,144.09
Net-(U41-Cext3): C143.1 U41.21 | length 9.8
  FC1 w0.15: v1(210.617,148.412) 210.625,148.404 U41.21@210.625,147.475
  IC2 w0.15: v1(203.615,145.491) 204.047,145.923 208.128,145.923 v1(210.617,148.412)
  BC1 w0.15: C143.1@203.48,146.09 203.48,145.626 v1(203.615,145.491)
Net-(U41-Cext4): C142.1 C144.2 U41.22 | length 5.3
  FC1 w0.15: v1(211.52,146.545) 211.734,146.545 211.875,146.686 U41.22@211.875,147.475
  BC1 w0.15: C142.1@209.48,146.09 209.48,145.69 210.08,145.09 C144.2@211.52,145.09 v1(211.52,146.545)
Net-(U41-Cext5): C141.2 C145.2 U41.23 | length 6.9
  FC1 w0.15: v1(213.175,145.491) U41.23@213.175,147.475
  BC4 w0.15: v1(214.52,145.491) 214.749,145.263 215.519,145.263 215.951,144.831 v1(216.52,144.831)
  BC1 w0.15: v1(213.175,145.491) v1(214.52,145.491) C145.2@214.52,146.09 ; C141.2@216.52,144.09 v1(216.52,144.831)
Net-(U41-Cext6): C146.1 U41.24 | length 13.8
  FC1 w0.15: U41.24@214.425,147.475 214.425,146.888 215.417,145.896 215.417,145.059 v1(215.189,144.831)
  BC1 w0.15: C146.1@206.48,146.09 206.48,145.491 206.963,145.008 209.499,145.008 210.972,143.535 213.208,143.535 214.503,144.831 v1(215.189,144.831)
Net-(U41-Cext7): C142.2 U41.25 | length 9.9
  FC1 w0.15: U41.25@215.725,147.475 215.725,148.409
  IC2 w0.15: 208.52,145.503 211.43,148.412 215.722,148.412 215.725,148.409
  BC1 w0.15: 208.52,145.503 C142.2@208.52,146.09
Net-(U41-Cext8): C143.2 U41.26 | length 16.6
  FC1 w0.15: v1(216.975,146.288) U41.26@216.975,147.475
  FC2 w0.15: 202.52,145.497 202.997,145.974 207.824,145.974 207.935,146.085 216.772,146.085 v1(216.975,146.288)
  BC1 w0.15: 202.52,145.497 C143.2@202.52,146.09
Net-(U41-Cext9): C146.2 U41.27 | length 15.7
  FC1 w0.15: U41.27@218.275,147.475 218.275,146.058 v1(218.478,145.855)
  FC2 w0.15: v1(205.52,145.297) 207.73,145.297 208.288,145.855 v1(218.478,145.855)
  BC1 w0.15: v1(205.52,145.297) C146.2@205.52,146.09
Net-(U41-CS): U41.7 U42.55 | length 21.9
  FC1 w0.15: 211.875,159.905 U41.7@211.875,160.825 ; v1(215.341,141.63) 215.352,141.641 U42.55@215.352,142.875
  IC1 w0.15: 211.875,159.905 214.122,157.658 214.122,142.85 v1(215.341,141.63)
Net-(U41-PD): U41.4 U42.57 | length 25.6
  FC1 w0.15: 214.352,141.632 U42.57@214.352,142.875 ; v1(215.087,161.747) 215.472,161.747 215.675,161.544 U41.4@215.675,160.825
  BC3 w0.15: 214.352,141.632 213.741,141.021 213.335,141.021 213.004,141.351 213.004,143.586 214.046,144.628 214.046,160.706 v1(215.087,161.747)
Net-(U41-SCLK1): U41.5 U42.53 | length 22.5
  FC1 w0.15: v1(214.425,159.893) U41.5@214.425,160.825 ; 216.352,141.636 U42.53@216.352,142.875
  FC3 w0.15: v1(214.425,159.893) 217.856,156.462 217.856,143.129 216.357,141.63 216.352,141.636
Net-(U41-SI0): U41.1 U42.59 | length 23
  FC1 w0.15: 213.352,141.638 U42.59@213.352,142.875 ; U41.1@219.525,160.825 219.525,159.9 v1(219.532,159.893)
  BC3 w0.15: 213.352,141.638 213.36,141.63 214.351,142.621 214.351,144.805 219.532,149.987 v1(219.532,159.893)
Net-(U41-SI1): U41.2 U42.58 | length 34.6
  FC1 w0.15: U42.58@213.852,142.875 213.852,143.875 214.437,144.46 215.392,144.46 216.83,145.898 217.145,145.898 217.551,146.304 217.551,148.742 217.094,149.2 210.515,149.2 209.804,149.911 209.804,152.07 211.353,153.619 217.819,153.619 218.225,154.026 U41.2@218.225,160.825
Net-(U41-SO0): U41.13 U42.62 | length 21.1
  FC1 w0.15: v1(204.225,157.988) U41.13@204.225,160.825 ; U42.62@211.852,142.875 211.852,144.11 v1(211.887,144.145)
  IC1 w0.15: v1(204.225,157.988) 206.959,155.254 206.959,151.435 210.007,148.387 210.007,146.025 v1(211.887,144.145)
Net-(U41-SO1): U41.17 U42.60 | length 11.6
  FC1 w0.15: U41.17@205.525,147.475 v1(205.525,148.412) ; U42.60@212.852,142.875 v1(212.852,144.12)
  FC3 w0.15: v1(205.525,148.412) 206.527,148.412 211.175,143.764 212.496,143.764 v1(212.852,144.12)
Net-(U42-C_EXT): R362.1 R371.2 U42.12 | length 33.7
  FC1 w0.15: v1(210.845,125.73) 210.852,125.737 U42.12@210.852,127.375
  BC3 w0.15: v1(212.613,125.781) 213.868,127.035 213.868,135.306 223.876,145.313 v1(223.876,149.479)
  BC1 w0.15: v1(210.845,125.73) 211.485,125.09 R371.2@212.49,125.09 212.49,125.657 v1(212.613,125.781) ; v1(223.876,149.479) 224.231,149.479 224.51,149.758 R362.1@224.51,150.09
Net-(U42-IO0): U42.66 U65.1 | length 19.5
  FC1 w0.15: U42.66@209.802,142.875 209.802,144.118 ; v1(222.834,143.688) 222.834,138.7 U65.1@222.85,138.7
  FC2 w0.15: 209.802,144.118 209.804,144.12 209.804,143.993 210.109,143.688 v1(222.834,143.688)
Net-(U42-IORD): R296.2 R301.1 U42.42 U56.3 | length 36.2
  FC1 w0.15: U42.42@219.127,136.95 220.364,136.95 v1(221.183,137.77)
  IC2 w0.15: v1(196.49,135.458) 199.03,137.998 220.955,137.998 v1(221.183,137.77)
  BC1 w0.15: R301.1@194.51,134.09 195.885,134.09 ; v1(196.49,135.458) R296.2@196.49,134.09 195.885,134.09 ; U56.3@196.862,130.74 195.885,130.74 195.478,131.146 195.478,133.684 195.885,134.09
Net-(U42-IOWR): R290.1 R298.1 U42.43 U56.6 | length 40.1
  FC1 w0.15: v1(216.662,136.22) 217.892,137.45 U42.43@219.127,137.45
  IC2 w0.15: v1(195.428,128.79) 200.494,128.79 203.606,131.902 212.344,131.902 v1(216.662,136.22)
  BC1 w0.15: U56.6@196.862,128.79 v1(195.428,128.79) 192.801,128.79 192.51,128.499 R290.1@192.51,126.09 192.51,125.625 192.557,125.578 197.408,125.578 197.51,125.679 R298.1@197.51,126.09
Net-(U42-RC_IN): R371.1 U42.11 | length 6.3
  FC1 w0.15: v1(210.352,126.136) U42.11@210.352,127.375
  IC1 w0.15: v1(210.352,126.136) 210.352,125.055 210.922,124.485 v1(213.512,124.485)
  BC1 w0.15: R371.1@213.51,125.09 213.51,124.488 v1(213.512,124.485)
Net-(U44A-+): R207.1 R210.1 U44.3 | length 68.8
  FC2 w0.15: v1(142.799,155.118) 143.002,154.915 150.085,154.915 v1(150.51,154.49) ; 150.51,155.793 150.52,155.804 157.277,155.804 157.836,155.245 160.985,155.245 162.179,154.051 195.919,154.051 v1(198.51,151.46)
  BC1 w0.15: v1(142.799,155.118) 143.177,154.74 U44.3@143.95,154.74 ; v1(150.51,154.49) R210.1@150.51,155.09 150.51,155.793 ; R207.1@198.51,143.09 v1(198.51,151.46)
Net-(U44A--): C137.1 R211.1 R214.1 U44.2 | length 10.2
  BC4 w0.15: v1(145.288,155.39) 145.814,154.864 147.117,154.864 147.498,154.483 147.51,154.495
  BC1 w0.15: U44.2@143.95,155.39 v1(145.288,155.39) ; 147.51,154.495 R211.1@147.51,155.09 147.93,155.09 148.48,155.64 C137.1@148.48,157.09 148.48,158.572 148.51,158.602 R214.1@148.51,160.09
Net-(U44B-+): R208.1 R209.1 U44.5 | length 104.8
  FC1 w0.15: v1(139.001,154.09) 139.548,153.543 139.548,148.109 152.578,135.079 152.578,118.262 153.162,117.678 154.432,117.678 154.889,117.221 154.889,72.492 v1(158.267,69.113)
  BC1 w0.15: U44.5@138.05,154.09 v1(139.001,154.09) ; v1(158.267,69.113) 158.699,68.682 160.104,68.682 160.51,68.275 R209.1@160.51,67.09 160.51,64.576 161.51,63.576 R208.1@161.51,61.09
Net-(U44B--): C138.1 R212.1 R213.1 U44.6 | length 16
  BC1 w0.15: R212.1@134.51,163.09 134.51,162.702 134.722,162.49 134.722,158.902 134.188,158.369 134.188,157.277 134.29,157.175 134.925,157.175 135.48,156.62 C138.1@135.48,155.09 136.576,155.09 136.926,154.74 U44.6@138.05,154.74 139.036,154.74 139.751,154.026 139.751,153.022 139.51,152.781 R213.1@139.51,152.09
Net-(U45A-A): U35.46 U35.78 U45.1 | length 34
  FC1 w0.15: U35.46@185.57,34.75 186.538,34.75 187.122,35.334 187.122,35.687 187.909,36.474 188.366,36.474 188.493,36.347 188.493,35.789 189.052,35.23 190.068,35.23 192.278,37.44 192.278,40.64 193.015,41.377 195.478,41.377 195.936,40.919 195.936,36.119 196.088,35.966 ; v1(196.088,40.603) 196.088,35.966 ; U35.78@200.72,33.75 198.304,33.75 196.088,35.966
  BC1 w0.15: v1(196.088,40.603) 196.85,41.365 U45.1@197.862,41.365
Net-(U45A-Cext): C130.2 U45.14 | length 8.6
  IC3 w0.15: v1(191.11,40.065) 191.287,39.887 191.287,33.387 v1(191.225,33.325)
  BC1 w0.15: v1(191.11,40.065) U45.14@192.137,40.065 ; v1(191.225,33.325) C130.2@191.225,34.09
Net-(U45A-Q): D33.2 U45.13 | length 2.8
  BC1 w0.15: D33.2@189.65,38.59 190.089,38.59 190.914,39.415 U45.13@192.137,39.415
Net-(U45A-RCext): C130.1 R182.2 U45.15 | length 19.3
  FC3 w0.15: v1(192.786,33.325) 192.786,41.631 v1(193.167,42.012)
  FC4 w0.15: v1(187.677,41.478) 188.529,42.33 192.849,42.33 v1(193.167,42.012)
  BC1 w0.15: v1(187.677,41.478) 188.366,41.478 188.49,41.602 R182.2@188.49,42.09 ; U45.15@192.137,40.715 193.155,40.715 193.167,40.727 v1(193.167,42.012) ; C130.1@192.775,34.09 192.775,33.336 v1(192.786,33.325)
Net-(U45B-B): U39.7 U45.10 | length 19.4
  BC1 w0.15: U45.10@192.137,37.465 194.259,37.465 194.996,38.202 194.996,41.504 196.571,43.078 197.739,43.078 198.145,43.485 198.145,48.006 198.73,48.59 201.12,48.59 201.32,48.39 U39.7@202.25,48.39
Net-(U45B-Q): D33.1 U45.5 | length 9.4
  BC4 w0.15: v1(190.348,39.59) 190.348,38.608 190.551,38.405 191.668,38.405 192.024,38.76 v1(196.845,38.76)
  BC1 w0.15: D33.1@189.65,39.59 v1(190.348,39.59) ; v1(196.845,38.76) 196.85,38.765 U45.5@197.862,38.765
Net-(U45B-RCext): C140.1 R215.1 U45.7 | length 12.4
  BC1 w0.15: U45.7@197.862,37.465 198.933,37.465 200.584,39.116 205.267,39.116 205.775,38.608 C140.1@205.775,38.09 205.775,36.714 205.51,36.449 R215.1@205.51,35.09
Net-(U46-RB): R75.2 U46.14 | length 22
  FC1 w0.15: v1(177.724,115.234) U46.14@179.522,115.234
  IC1 w0.15: v1(164.694,127.483) 165.659,126.517 168.783,126.517 170.358,124.943 170.358,122.6 v1(177.724,115.234)
  BC1 w0.15: R75.2@164.49,128.09 164.49,127.686 v1(164.694,127.483)
Net-(U46-toBUFF): R69.1 U46.2 | length 16.2
  FC1 w0.15: v1(171.171,116.459) U46.2@172.572,116.459
  BC3 w0.15: v1(171.171,116.459) 176.225,121.514 v1(176.225,128.341)
  BC1 w0.15: v1(176.225,128.341) 176.51,128.626 R69.1@176.51,129.09
Net-(U47B-+): C158.2 R27.1 R33.1 U47.5 | length 23.9
  BC1 w0.15: R27.1@158.373,6.858 159.995,6.858 160.376,6.477 C158.2@162.039,6.477 162.039,7.01 162.141,7.112 165.481,7.112 165.684,6.909 167.871,6.909 168.277,7.315 R33.1@168.277,7.874 168.277,10.566 169.014,11.303 U47.5@177.694,11.303
Net-(U49-A8): R219.2 U49.11 | length 2.9
  BC1 w0.15: U49.11@189.6,80.165 190.983,80.165 191.058,80.09 R219.2@192.49,80.09
Net-(U49-B8): R223.1 U49.14 | length 9.2
  FC4 w0.15: v1(176.51,85.44) 181.026,80.924 v1(181.026,80.162)
  BC1 w0.15: v1(176.51,85.44) R223.1@176.51,86.09 ; v1(181.026,80.162) 181.028,80.165 U49.14@182.4,80.165
Net-(U49-DIR): R364.2 R370.1 U49.2 | length 49
  FC2 w0.15: v1(190.754,86.015) 195.387,86.015 196.723,87.351 v1(198.49,87.351)
  IC4 w0.15: v1(155.702,78.486) 166.649,78.486 171.297,83.134 174.904,83.134 175.057,83.287 178.257,83.287 180.986,86.015 v1(190.754,86.015)
  BC1 w0.15: R370.1@155.51,79.09 155.51,78.678 v1(155.702,78.486) ; U49.2@189.6,86.015 v1(190.754,86.015) ; v1(198.49,87.351) R364.2@198.49,88.09
Net-(U49-G#): C270.2 D3.1 D3.3 R258.2 U49.23 | length 70.1
  BC1 w0.15: C270.2@124.52,79.09 124.52,78.232 124.622,78.13 134.087,78.13 134.569,78.613 134.569,81.686 135.001,82.118 156.235,82.118 157.429,83.312 157.429,84.125 158.394,85.09 169.875,85.09 170.307,85.522 170.307,87.376 171.069,88.138 177.613,88.138 178.375,87.376 D3.1@178.375,86.365 ; R258.2@178.49,84.09 178.49,85.166 178.375,85.281 D3.1@178.375,86.365 ; U49.23@182.4,86.015 181.223,86.015 180.873,86.365 D3.3@179.7,86.365 D3.1@178.375,86.365
Net-(U51-CASAH#): R51.1 U51.112 | length 4
  FC1 w0.15: v1(104.825,27.61) U51.112@104.825,28.66
  FC4 w0.15: 102.51,27.563 102.591,27.483 102.718,27.61 v1(104.825,27.61)
  BC1 w0.15: 102.51,27.563 R51.1@102.51,28.09
Net-(U51-CASAL#): R58.1 U51.113 | length 6.9
  FC1 w0.15: U51.113@105.475,28.66 105.475,26.478 105.867,26.086 105.867,23.063 105.51,22.706
  BC1 w0.15: R58.1@105.51,22.09 105.51,22.706
Net-(U51-CCLK): R255.2 U51.35 | length 18.2
  FC1 w0.15: 87.925,57.871 U51.35@87.925,59.1
  IC4 w0.15: 87.925,57.871 91.77,54.026 92.227,54.026 v1(99.49,61.288)
  BC1 w0.15: v1(99.49,61.288) R255.2@99.49,62.09
Net-(U51-FLM): R14.1 U51.53 | length 12.1
  FC1 w0.15: U51.53@82.13,48.755 83.718,48.755 84.303,48.171 v1(84.303,47.295)
  FC4 w0.15: v1(78.51,45.848) 78.71,45.648 82.656,45.648 v1(84.303,47.295)
  BC1 w0.15: v1(78.51,45.848) R14.1@78.51,48.09
Net-(U51-HSYNC): R53.2 U51.51 | length 13.4
  FC1 w0.15: U51.51@82.13,50.055 83.786,50.055 v1(83.922,50.19)
  IC2 w0.15: v1(74.092,51.486) 74.473,51.867 82.245,51.867 v1(83.922,50.19)
  BC1 w0.15: v1(74.092,51.486) 74.295,51.486 74.49,51.681 R53.2@74.49,52.09
Net-(U51-IO0): R11.1 U8.2 U51.114 | length 9.9
  FC1 w0.15: v1@106.125,26.844 U51.114@106.125,28.66 ; U8.2@109.581,21.071 v1(109.581,22.022)
  IC3 w0.15: v1(106.121,26.695) 106.121,25.482 v1(109.581,22.022)
  BC1 w0.15: v1@106.125,26.844 v1(106.121,26.695) 106.274,26.695 106.51,26.459 R11.1@106.51,26.09
Net-(U51-IO1): R1.2 U8.3 U51.116 | length 12.5
  FC1 w0.15: v1(107.425,27.615) U51.116@107.425,28.66 ; U8.3@108.781,21.071 v1(108.781,26.254)
  IC1 w0.15: v1(107.425,27.615) 107.425,27.61 v1(108.781,26.254)
  FC4 w0.15: v1(104.49,29.693) 105.347,29.693 v1(107.425,27.615)
  BC1 w0.15: R1.2@104.49,29.09 v1(104.49,29.693)
Net-(U51-IO2): R10.2 U8.4 U51.117 | length 11.9
  FC1 w0.15: v1(106.947,31.14) 106.947,30.34 107.696,29.591 107.948,29.591 108.075,29.464 U51.117@108.075,28.66 108.075,24.91 107.981,24.816 U8.4@107.981,21.071
  BC1 w0.15: R10.2@106.49,32.09 106.49,31.598 v1(106.947,31.14)
Net-(U51-IO3): R6.2 U8.5 U51.119 | length 13.4
  FC1 w0.15: U8.5@107.181,21.071 v1(107.181,25.774) ; U51.119@109.375,28.66 v1@109.375,29.715
  FC3 w0.15: v1(107.181,25.774) 108.077,26.67 108.077,28.423 v1(109.372,29.718)
  BC1 w0.15: v1(109.372,29.718) 109.375,29.715 111,28.09 R6.2@111.49,28.09
Net-(U51-IO4): R7.2 U8.7 U51.120 | length 18.6
  FC1 w0.15: v1(105.581,20.142) U8.7@105.581,21.071 ; 109.49,31.48 109.499,31.471 109.499,30.175 110.025,29.65 U51.120@110.025,28.66
  FC3 w0.15: v1(105.581,20.142) 106.807,21.368 106.807,27.61 107.417,28.219 107.417,30.734 v1(108.773,32.09)
  BC1 w0.15: v1(108.773,32.09) R7.2@109.49,32.09 109.49,31.48
Net-(U51-IO5): R13.2 U8.8 U51.121 | length 15.6
  FC1 w0.15: U8.8@104.781,21.071 104.781,22.79 v1(105.105,23.114) ; v1(111.15,31.205) U51.121@112.217,31.205 ; v1(112.49,30.48) 112.217,30.753 U51.121@112.217,31.205 ; U51.121@112.57,31.205 U51.121@112.217,31.205
  BC3 w0.15: v1(105.105,23.114) 111.15,29.159 v1(111.15,31.205)
  BC1 w0.15: v1(112.49,30.48) R13.2@112.49,31.09
Net-(U51-IO6): R5.2 U8.9 U51.122 | length 23.3
  FC1 w0.15: v1(103.981,20.142) U8.9@103.981,21.071 ; U51.122@112.57,31.855 113.792,31.855 ; v1(113.589,27.889) 114.224,28.524 114.224,31.423 113.792,31.855 ; v1(115.494,29.489) 115.494,30.585 114.224,31.855 113.792,31.855
  IC2 w0.15: v1(103.981,20.142) 111.728,27.889 v1(113.589,27.889)
  BC1 w0.15: R5.2@115.49,30.09 115.49,29.493 v1(115.494,29.489)
Net-(U51-IO7): R2.2 U8.10 U51.123 | length 23.2
  FC1 w0.15: U8.10@103.181,21.071 103.181,22.016 ; U51.123@112.57,32.505 113.607,32.505
  BC1 w0.15: 103.181,22.016 103.911,21.285 108.145,21.285 112.954,26.094 112.954,33.172 ; R2.2@112.49,34.09 112.49,33.636 112.954,33.172 ; 113.607,32.505 113.614,32.512 112.954,33.172
Net-(U51-IO8): R269.1 U8.31 U51.124 | length 38.3
  FC1 w0.15: U8.31@103.181,9.871 103.181,10.814 ; v1(111.506,32.944) 111.717,33.155 U51.124@112.57,33.155
  BC1 w0.15: R269.1@96.51,21.09 96.51,20.65 ; 103.181,10.814 103.175,10.82 102.591,10.82 96.51,16.901 96.51,20.65 ; v1(111.506,32.944) 111.506,30.988 111.354,30.836 108.102,30.836 107.417,30.15 107.417,29.794 105.562,27.94 105.562,27.534 100.813,22.784 100.813,20.98 100.381,20.549 96.612,20.549 96.51,20.65
Net-(U51-IO9): R259.1 U8.32 U51.125 | length 45.9
  FC1 w0.15: v1(100.66,8.941) 103.778,8.941 103.981,9.144 U8.32@103.981,9.871 v1(103.981,12.548) ; v1(111.506,33.604) 111.707,33.805 U51.125@112.57,33.805
  IC1 w0.15: v1(95.656,17.354) 95.656,10.135 96.317,9.474 100.127,9.474 v1(100.66,8.941)
  BC3 w0.15: v1(103.981,12.548) 111.506,20.073 111.506,31.572 111.15,31.928 111.15,33.249 v1(111.506,33.604)
  BC1 w0.15: R259.1@95.51,18.09 95.51,17.501 v1(95.656,17.354)
Net-(U51-IO10): R61.2 U8.33 U51.126 | length 55
  FC1 w0.15: U8.33@104.781,9.871 v1(104.781,10.801) ; v1(111.519,34.442) 111.531,34.455 U51.126@112.57,34.455
  FC3 w0.15: v1(104.781,10.801) 105.6,9.982 111.354,9.982 111.887,10.516 111.887,34.074 v1(111.519,34.442)
  BC1 w0.15: R61.2@92.49,21.09 92.49,19.101 92.922,18.669 95.91,18.669 96.139,18.44 96.139,13.614 99.873,9.881 103.861,9.881 v1(104.781,10.801)